# Altium PCB УШЯИ.467444.130.PcbDoc (part 4 of 4)
Units mm, origin at the board's own origin, x right, y up, seen from the top; angles counter-clockwise.
Board outline 280 x 190 mm, 6 copper layers (Top, GND, INT1, INT2, POWER, Bottom), stack 1.422 mm thick; 223 components, 176 nets, 1081 pads, 326 vias.
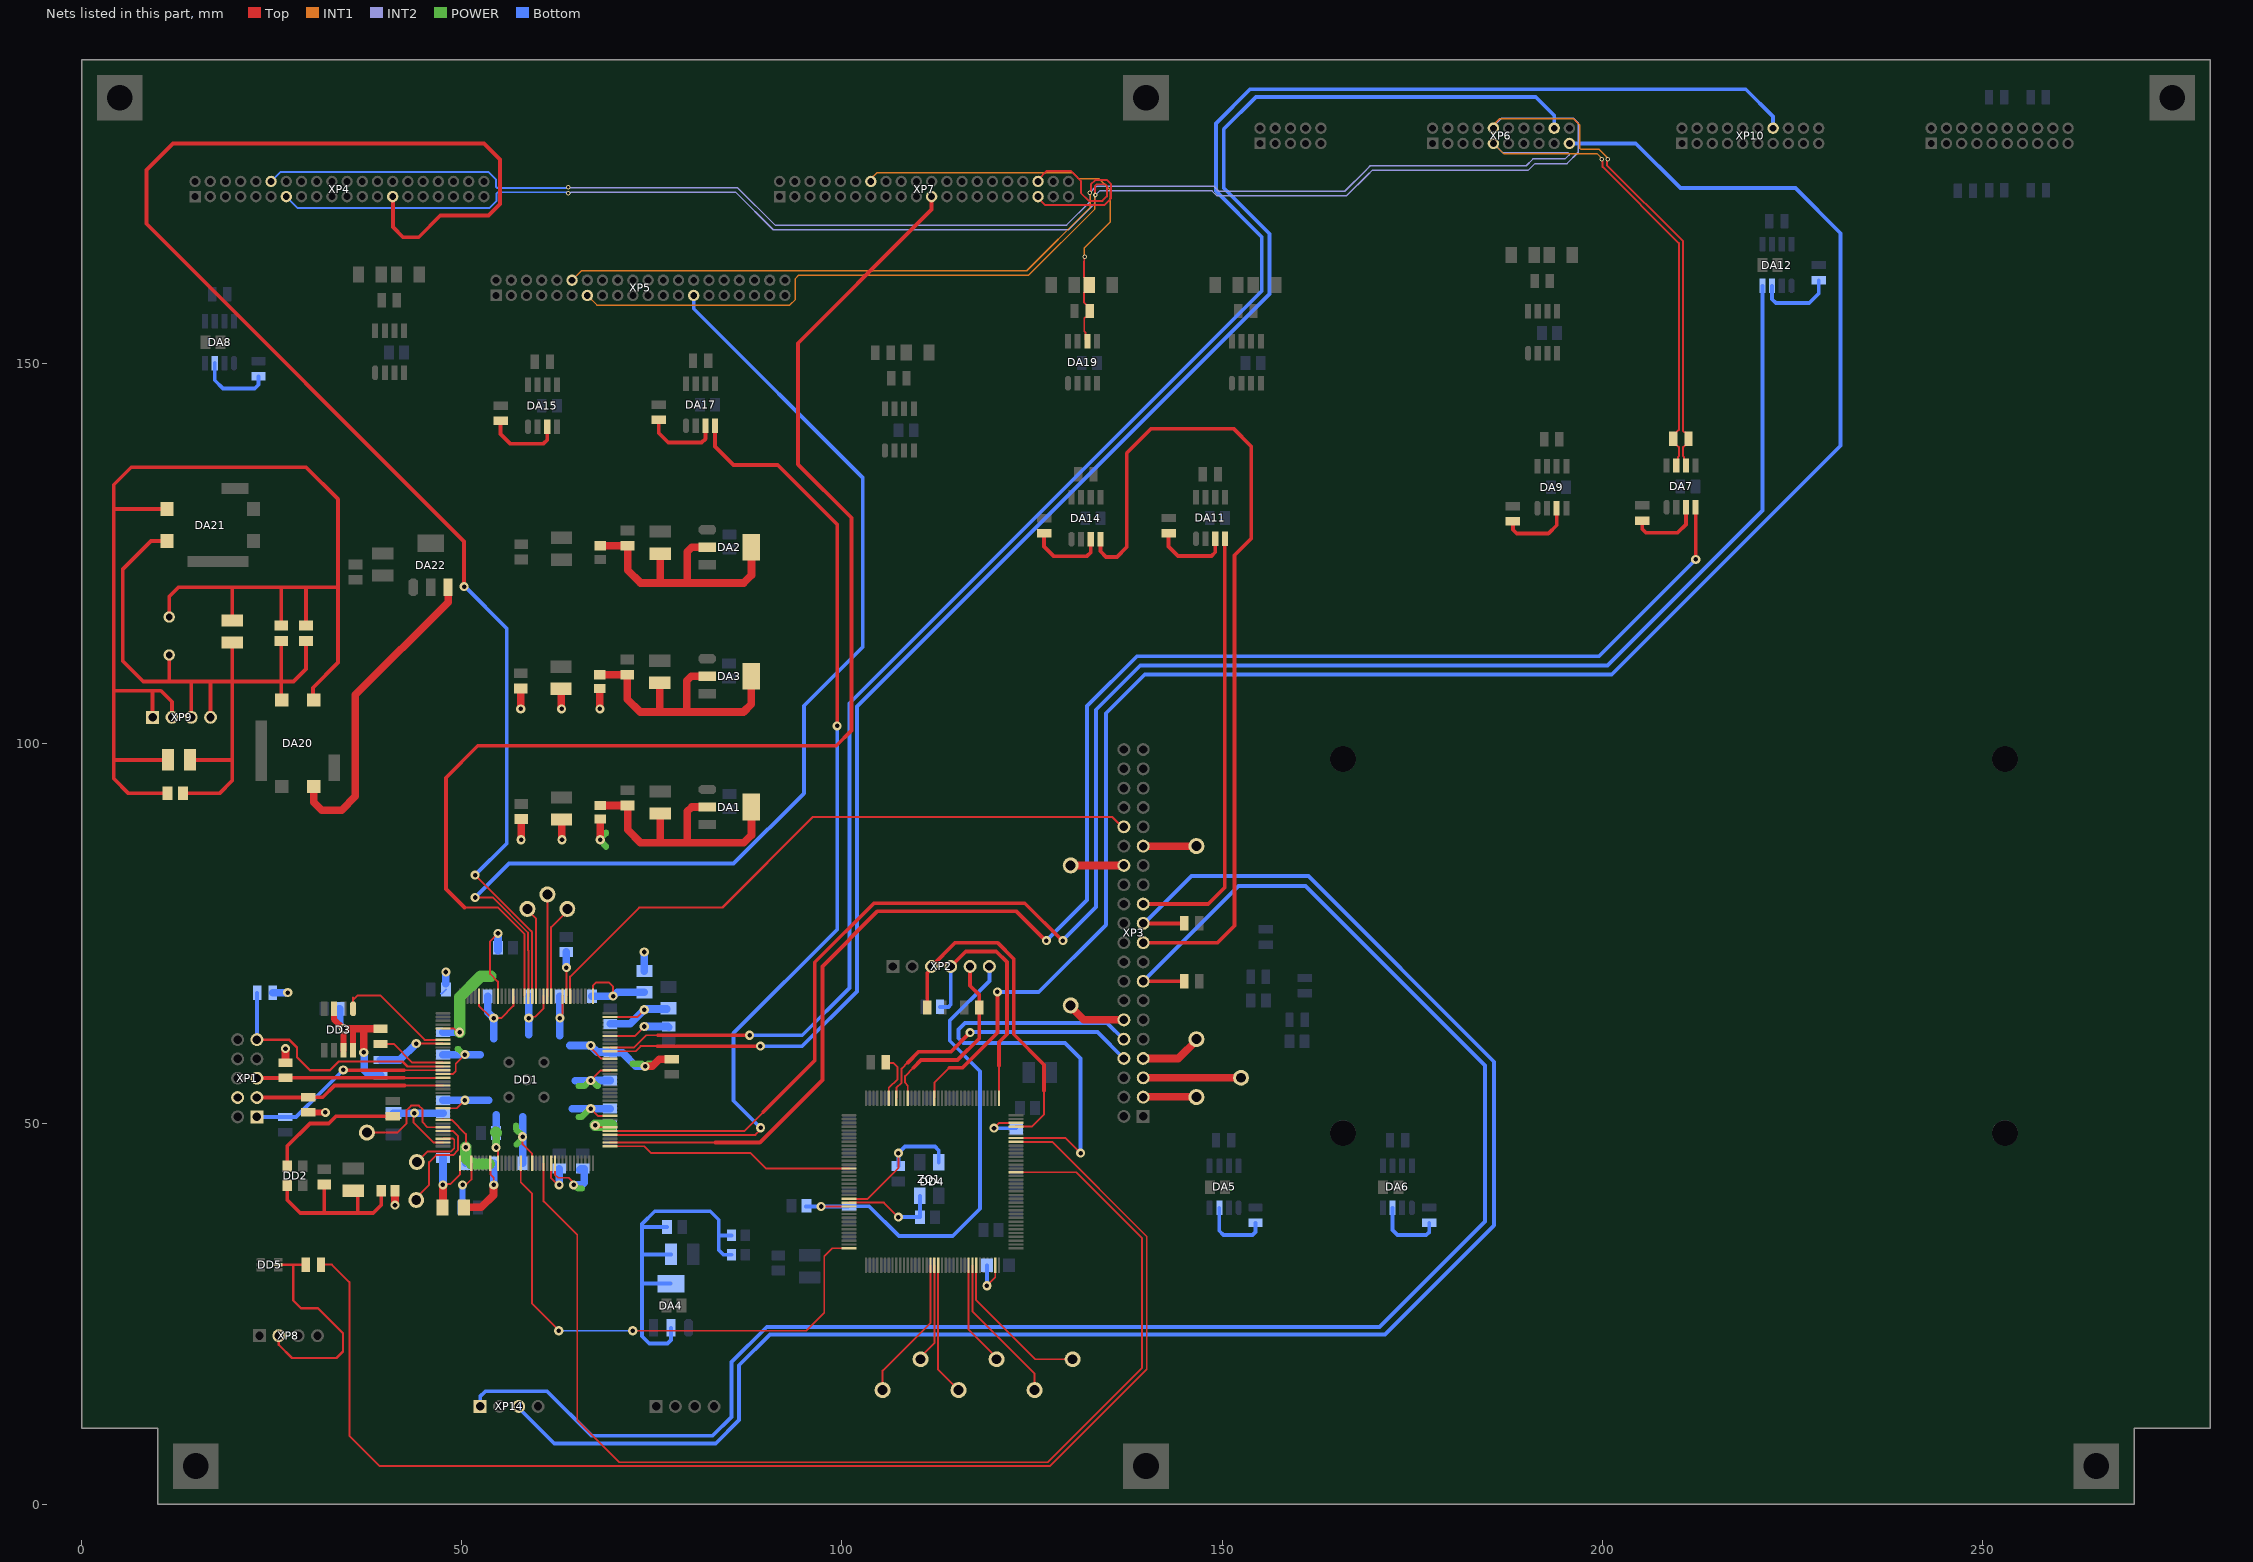
[diagram p8: the nets of this part, all layers, seen from the top]

## Via types
v1: diameter 1.2, hole 0.6, Top to Bottom, tented both sides, 284 vias
v2: diameter 0.6, hole 0.3, Top to Bottom, tented both sides, 42 vias

## Nets (pads, with @x,y where several pads share a name; then routed paths per layer and width w, separated by ;. In a path a pad name is that pad's centre, name@x,y a point inside that pad or via, vN(x,y) a via of type N, cw(c..) or ccw(c..) an arc to the next point about the centre after c; other vN are vias at no path point) (continued)
LINE_p: DA19.6 R47.2 R49.1 XP7.14 | length 56.1
  Top w0.25: v2(131.95,164.083) 131.883,164.016 131.883,163.508 131.825,163.45 131.825,162.215 131.825,161.375 132.55,160.65 R49.1@132.55,160.35 132.55,160.05 131.825,159.325 131.825,158.753 131.825,158.125 132.6,157.35 R47.2@132.6,156.95 132.6,156.55 132.175,156.125 132.021,156.125 131.875,155.979 131.875,154.538 131.875,154.275 132.052,154.098 132.052,153.183 DA19.6@132.285,152.95
  INT1 w0.2: XP7.14@103.8,174 103.8,174.35 104.6,175.15 130.4,175.15 131.026,174.524 131.026,174.458 131.144,174.341 133.833,174.341 135.275,172.899 135.275,168.642 131.85,165.217 131.85,164.4 131.873,164.377 131.873,164.16 v2(131.95,164.083)
N_CONF: DD1.14 R8.1 | length 9.2
  Top w0.25: R8.1@39.3,60.525 41.05,60.525 43.5,58.075 DD1.14@47.512,58.075
NCS: DD1.8 DD3.1 | length 15.9
  Top w0.25: DD3.1@35.705,65.175 35.705,66.654 ; 35.705,66.354 36.276,66.925 39.25,66.925 45.1,61.075 DD1.8@47.512,61.075
NetC1_2: C1.2 C2.+ DD2.4 L8.2 | length 23.9
  Top w0.5: DD2.4@27.025,41.925 27.025,40 28.75,38.275 31.899,38.275 ; C1.2@31.899,42.049 31.899,38.275 ; C2.+@36.199,41.099 36.297,41 36.297,38.275 ; L8.2@39.4,41.122 39.4,39.325 38.35,38.275 36.297,38.275 ; 31.899,38.275 36.297,38.275
NetC10_2: C10.2 C11.+ DA2.2 DA2.4 L6.1 | length 38.8
  Top w1: L6.1@68.2,126.075 C10.2@71.8,126.075 71.8,122.875 73.5,121.175 76.1,121.175 ; C11.+@76.1,125.025 76.1,121.175 ; DA2.2@82.3,125.875 80.236,125.875 79.65,125.289 79.65,121.175 ; DA2.4@88.1,125.875 88.1,122.175 87.1,121.175 79.65,121.175 ; 76.1,121.175 79.65,121.175
NetC25_2: C25.2 C26.+ DA1.2 DA1.4 L2.1 | length 38.8
  Top w1: L2.1@68.2,91.9 C25.2@71.8,91.9 71.8,88.7 73.5,87 76.1,87 ; C26.+@76.1,90.85 76.1,87 ; 79.65,87 79.65,91.114 80.236,91.7 DA1.2@82.3,91.7 ; DA1.4@88.1,91.7 88.1,88 87.1,87 76.1,87
NetC27_2: C27.2 C28.+ DA3.2 DA3.4 L7.1 | length 38.8
  Top w1: L7.1@68.15,109.1 C27.2@71.75,109.1 71.75,105.9 73.45,104.2 76.05,104.2 ; C28.+@76.05,108.05 76.05,104.2 ; 79.6,104.2 79.6,108.314 80.186,108.9 DA3.2@82.25,108.9 ; DA3.4@88.05,108.9 88.05,105.2 87.05,104.2 76.05,104.2
NetC59_+: C59.+ C94.2 DA4.2 DA4.4 L9.1 L10.1 | length 50.6
  Bottom w0.5: C94.2@77,36.45 73.725,36.45 73.7,36.475 ; DA4.4@77.481,29.025 73.7,29.025 ; DA4.2@77.506,23.2 77.506,21.581 77.05,21.125 74.65,21.125 73.7,22.075 73.7,29.025 ; C59.+@77.531,32.85 73.8,32.85 73.7,32.95 ; L9.1@85.475,32.8 85.468,32.807 84.418,32.807 83.8,33.425 83.8,35.41 ; L10.1@85.475,35.35 83.86,35.35 83.8,35.41 ; 73.7,29.025 73.7,32.95 ; 73.7,32.95 73.7,36.475 ; 73.7,36.475 73.7,36.85 75.375,38.525 82.67,38.525 83.8,37.395 83.8,35.41
NetC60_1: C60.1 DD4.24 ZQ1.1 | length 12.9
  Top w0.25: DD4.24@100.924,39.65 105.525,39.65 v1(107.425,37.75)
  Bottom w0.5: v1(107.425,37.75) C60.1@110.25,37.75 110.25,40.525 ZQ1.1@110.225,40.55
NetC61_1: C61.1 DD4.23 ZQ1.3 | length 19.3
  Top w0.25: DD4.23@100.924,40.15 103.375,40.15 107.425,44.2 v1(107.425,46.175)
  Bottom w0.5: C61.1@107.425,44.45 v1(107.425,46.175) 108.275,47.025 112.225,47.025 112.725,46.525 ZQ1.3@112.725,44.95
NetC66_+: C66.+ DD4.71 | length 5.8
  Top w0.25: v1(119.075,28.725) 120.162,29.812 DD4.71@120.162,31.412
  Bottom w0.5: v1(119.075,28.725) C66.+@119.075,31.425
NetC67_+: C67.+ DD4.106 | length 6.1
  Top w0.25: v1(120,49.45) 120.7,50.15 DD4.106@122.9,50.15
  Bottom w0.5: v1(120,49.45) C67.+@122.925,49.45
NetC82_1: C82.1 C84.1 C86.+ C87.2 C88.+ C89.+ DA20.1 DA21.1 XP9.1 XP9.2 | length 175
  Top w0.5: XP9.1@9.32,103.5 9.32,106.97 9.35,107 ; DA21.1@11.203,130.9 4.2,130.9 ; C89.+@11.321,97.9 4.4,97.9 4.2,98.1 ; C87.2@11.5,93.5 C87.2@11.3,93.5 6.15,93.5 4.2,95.45 4.2,98.1 ; C86.+@11.5,116.7 11.5,119.4 12.7,120.6 19.8,120.6 ; XP9.2@11.86,103.5 11.86,105.54 10.4,107 9.35,107 ; C88.+@19.8,116.25 19.8,120.6 ; C82.1@26.25,115.563 26.25,120.6 ; C84.1@29.5,115.563 29.5,120.6 ; DA20.1@30.4,105.4 30.4,107.4 33.7,110.7 33.7,120.6 ; 4.2,98.1 4.2,107 ; 4.2,107 4.2,130.9 ; 4.2,107 9.35,107 ; 4.2,130.9 4.2,134.103 6.497,136.4 29.5,136.4 33.7,132.2 33.7,120.6 ; 19.8,120.6 26.25,120.6 ; 26.25,120.6 29.5,120.6 ; 29.5,120.6 33.7,120.6
NetC82_2: C82.2 C84.2 C86.- C87.1 C88.- C89.- DA20.3 DA21.3 XP9.3 XP9.4 | length 100.9
  Top w0.5: DA21.3@11.203,126.7 9.087,126.7 5.4,123.013 5.4,110.878 8.079,108.199 11.597,108.199 ; C86.-@11.5,111.7 11.5,108.296 11.597,108.199 ; C87.1@13.9,93.5 18.1,93.5 19.8,95.2 19.8,97.9 ; C89.-@14.221,97.9 19.8,97.9 ; XP9.3@14.4,103.5 14.4,108.149 ; XP9.4@17.1,103.66 XP9.4@16.94,103.5 16.94,108.199 ; C88.-@19.8,113.35 19.8,108.199 ; DA20.3@26.25,105.225 26.25,108.4 C82.2@26.25,113.563 ; C84.2@29.5,113.563 29.5,109.856 27.843,108.199 19.8,108.199 ; 11.597,108.199 14.4,108.199 16.94,108.199 ; 16.94,108.199 19.6,108.199 ; 19.6,108.199 19.8,108.199 ; 19.6,108.199 19.8,107.999 19.8,97.9
NetDA5_3: DA5.3 R15.2 | length 9.4
  Bottom w0.5: DA5.3@149.645,38.992 149.645,35.955 150.2,35.4 154.005,35.4 154.405,35.8 R15.2@154.405,37.017
NetDA6_3: DA6.3 R17.2 | length 9.4
  Bottom w0.5: DA6.3@172.435,38.992 172.435,36.035 173.07,35.4 176.875,35.4 177.275,35.8 R17.2@177.275,37.017
NetDA7_3: DA7.3 R19.2 | length 9.8
  Top w0.5: R19.2@205.275,129.375 205.275,128.275 205.775,127.775 209.929,127.775 211.029,128.875 DA7.3@211.029,131.125
NetDA8_3: DA8.3 R20.2 | length 9.8
  Bottom w0.5: DA8.3@17.496,150.1 17.496,147.85 18.596,146.75 22.75,146.75 23.25,147.25 R20.2@23.25,148.35
NetDA9_3: DA9.3 R21.2 | length 9.8
  Top w0.5: R21.2@188.275,129.275 188.275,128.175 188.775,127.675 192.929,127.675 194.029,128.775 DA9.3@194.029,131.025
NetDA11_3: DA11.3 R28.2 | length 10.4
  Top w0.5: R28.2@142.975,127.725 142.975,125.975 144.225,124.725 148.61,124.725 149.11,125.225 DA11.3@149.11,126.975
NetDA12_3: DA12.3 R29.2 | length 10.4
  Bottom w0.5: DA12.3@222.365,160.25 222.365,158.5 222.865,158 227.25,158 228.5,159.25 R29.2@228.5,161
NetDA14_3: DA14.3 R35.2 | length 10.4
  Top w0.5: R35.2@126.6,127.7 126.6,125.95 127.85,124.7 132.235,124.7 132.735,125.2 DA14.3@132.735,126.95
NetDA15_3: DA15.3 R36.2 | length 10.4
  Top w0.5: R36.2@55.1,142.5 55.1,140.75 56.35,139.5 60.735,139.5 61.235,140 DA15.3@61.235,141.75
NetDA17_3: DA17.3 R42.2 | length 10.4
  Top w0.5: R42.2@75.9,142.634 75.9,140.884 77.15,139.634 81.535,139.634 82.035,140.134 DA17.3@82.035,141.884
NetDA20_2: DA20.2 DA22.3 | length 41.3
  Top w1: DA20.2@30.5,94.4 30.5,92.35 31.55,91.3 34.2,91.3 36,93.1 36,106.463 48.2,118.663 DA22.3@48.2,120.6
NetDD1_31: DD1.31 TP5.1 | length 14.7
  Top w0.25: TP5.1@37.505,48.875 41.5,48.875 42.725,50.1 42.725,51.825 43.325,52.425 44.35,52.425 44.825,51.95 44.825,50.225 45.475,49.575 DD1.31@47.512,49.575
NetDD1_32: DD1.32 TP4.1 | length 14.2
  Top w0.25: TP4.1@44,40 44,40.3 45.687,41.987 45.687,44.987 46.619,45.919 48.844,45.919 49.475,46.55 49.475,48.45 48.85,49.075 DD1.32@47.512,49.075
NetDD1_34: DD1.34 TP6.1 | length 8.3
  Top w0.25: TP6.1@44.075,45 45.444,46.369 48.544,46.369 49,46.825 49,47.92 48.854,48.066 47.521,48.066 DD1.34@47.512,48.075
NetDD1_120: DD1.120 TP1.1 | length 12.1
  Top w0.25: DD1.120@61.75,66.813 61.75,75.9 63.375,77.525 63.436,77.525 TP1.1@63.517,77.444 ; TP1.1@63.517,77.8 TP1.1@63.874,78.156
NetDD1_121: DD1.121 TP2.1 | length 13.1
  Top w0.25: TP2.1@61.162,79.888 61.25,79.8 DD1.121@61.25,66.813
NetDD1_124: DD1.124 TP3.1 | length 12
  Top w0.25: TP3.1@58.626,78.3 58.626,78.174 59.75,77.05 DD1.124@59.75,66.813
NetDD2_3: DD2.3 R2.1 | length 18.1
  Top w0.5: DD2.3@27.025,44.487 27.025,47.1 30,50.075 32.485,50.075 33.435,51.025 R2.1@40.9,51.025
NetDD4_54: DD4.54 TP12.1 | length 19
  Top w0.25: TP12.1@105.35,15 105.35,17.55 111.662,23.862 DD4.54@111.662,31.412
NetDD4_55: DD4.55 TP11.1 | length 13.1
  Top w0.25: TP11.1@110.35,19.05 110.35,19.35 112.162,21.162 DD4.55@112.162,31.412
NetDD4_56: DD4.56 TP10.1 | length 17.5
  Top w0.25: DD4.56@112.662,31.412 112.662,17.688 TP10.1@115.35,15
NetDD4_64: DD4.64 TP9.1 | length 13.7
  Top w0.25: DD4.64@116.662,30.742 116.662,22.938 TP9.1@120.796,18.804
NetDD4_65: DD4.65 TP8.1 | length 19.8
  Top w0.25: DD4.65@117.162,31.412 117.162,25.338 125.35,17.15 TP8.1@125.35,15
NetDD4_66: DD4.66 TP7.1 | length 20.5
  Top w0.25: DD4.66@117.662,31.412 117.662,26.838 125.45,19.05 TP7.1@130.35,19.05
NetDD4_138: DD4.138 R10.2 | length 6.4
  Top w0.25: R10.2@105.775,58.1 105.825,58.05 106.75,58.05 107.325,57.475 107.325,55.9 106.162,54.737 DD4.138@106.162,53.388
NetDD5_5: DD5.5 R50.2 XP8.2 | length 29.7
  Top w0.3: DD5.5@25.85,31.5 27.825,31.5 ; XP8.2@25.92,22.15 25.92,20.955 27.65,19.225 33.5,19.225 34.35,20.075 34.35,22.474 31.074,25.75 28.85,25.75 27.825,26.775 27.825,31.5 ; R50.2@29.475,31.5 27.825,31.5
NetTP13_1: TP13.1 XP3.3 | length 6.9
  Top w1: XP3.3@139.692,53.6 TP13.1@146.568,53.6
NetTP14_1: TP14.1 XP3.5 | length 12.9
  Top w1: XP3.5@139.78,56.1 TP14.1@152.65,56.1
NetTP15_1: TP15.1 XP3.7 | length 8.3
  Top w1: XP3.7@139.577,58.618 144.26,58.618 TP15.1@146.8,61.158
NetTP16_1: TP16.1 XP3.29 | length 7.2
  Top w1: XP3.29@139.655,86.556 TP16.1@146.825,86.556
NetTP17_1: TP17.1 XP3.12 | length 7.7
  Top w1: TP17.1@130.09,65.435 131.827,63.698 XP3.12@137.09,63.698
NetTP18_1: TP18.1 XP3.28 | length 7.1
  Top w1: TP18.1@130.025,83.953 130.072,84 XP3.28@137.09,84
NRST: C57.2 DD4.25 R14.2 XP2.6 | length 65.3
  Top w0.25: v1(97.25,39.15) DD4.25@100.924,39.15
  Bottom w0.5: C57.2@95.275,39.15 v1(97.25,39.15) 97.263,39.162 R14.2@100.813,39.162 ; R14.2@100.95,39.175 103.575,39.175 107.5,35.25 114.575,35.25 118.175,38.85 118.175,56.95 114.175,60.95 114.175,63.6 119.395,68.82 XP2.6@119.395,70.725
NSTAT: DD1.9 R6.1 | length 9.1
  Top w0.25: v1(44,60.575) DD1.9@47.512,60.575
  Bottom w1: R6.1@39.3,58.425 41.85,58.425 v1(44,60.575)
OVLB: DD1.125 XP4.27 | length 208.4
  Top w0.25: v1(51.75,82.75) 51.766,82.75 59.15,75.366 59.15,75.35 59.25,75.25 DD1.125@59.25,66.813
  Top w0.5: XP4.27@40.9,172 40.935,171.965 40.935,170.914 40.935,167.993 42.265,166.664 44.329,166.664 47.165,169.5 53.5,169.5 55.02,171.02 55.02,176.891 52.911,179 12,179 8.5,175.5 8.5,168.425 50.3,126.625 v1(50.3,120.7)
  Bottom w0.5: v1(50.3,120.7) 50.4,120.7 55.9,115.2 55.9,86.9 v1(51.75,82.75)
OVLI_1: DD1.98 XP6.18 | length 222.1
  Top w0.25: DD1.98@69.488,59.575 72.857,59.575 73.521,60.239 75.731,60.239
  Top w0.5: 75.731,60.239 v1(89.275,60.239)
  Bottom w0.5: v1(89.275,60.239) 94.789,60.239 102,67.45 102,104.925 156.25,159.175 156.25,167.125 150.225,173.15 150.225,180.875 154.45,185.1 191.275,185.1 193.7,182.675 XP6.18@193.7,181
OVLI_2: DD1.99 XP10.14 | length 251.6
  Top w0.25: DD1.99@69.488,60.075 72.65,60.075 74.25,61.675 75.771,61.675
  Top w0.5: 75.771,61.675 v1(87.85,61.675)
  Bottom w0.5: v1(87.85,61.675) 94.775,61.675 100.975,67.875 100.975,105.35 155.225,159.6 155.225,166.7 149.2,172.725 149.2,181.625 153.7,186.125 218.9,186.125 222.5,182.525 XP10.14@222.5,181
OVLP: DD1.126 XP5.27 | length 144.1
  Top w0.25: v1@51.737,79.813 54.067,79.813 58.7,75.179 58.7,72.85 58.75,72.8 DD1.126@58.75,66.813
  Bottom w0.5: v1(51.75,79.8) 56.2,84.25 85.75,84.25 95,93.5 95,105.025 102.75,112.775 102.75,135 80.5,157.25 XP5.27@80.5,159
OVLW: DD1.127 XP7.21 | length 172
  Top w0.25: 50.35,78.475 54.768,78.475 58.25,74.993 DD1.127@58.25,66.813
  Top w0.5: 50.35,78.475 47.9,80.925 47.9,95.553 52.098,99.75 99.25,99.75 101.25,101.75 101.25,129.75 94.221,136.779 94.221,152.721 109.825,168.325 111.8,170.3 XP7.21@111.8,172
PULSB: DA17.4 DD1.76 | length 129.9
  Top w0.25: DD1.76@69.488,48.575 88.619,48.575 89.3,49.256 v1(89.3,49.5)
  Top w0.5: DA17.4@83.305,141.884 83.305,139.12 85.721,136.704 91.546,136.704 99.375,128.875 v1(99.375,102.375)
  Bottom w0.5: v1(89.3,49.5) 85.75,53.05 85.75,61.95 99.375,75.575 v1(99.375,102.375)
PULSC: DA12.4 DD1.77 | length 241.9
  Top w0.25: DD1.77@69.488,49.075 87.15,49.075 89.65,51.575
  Top w0.5: 89.65,51.575 96.425,58.35 96.425,71.275 104.2,79.05 124.05,79.05 128.975,74.125 v1(129.075,74.125)
  Bottom w0.5: v1(129.075,74.125) 129.075,74.2 133.425,78.55 133.425,104.488 139.237,110.3 200.7,110.3 221.095,130.695 DA12.4@221.095,160.25
REQ_RD: DD1.115 XP3.32 | length 84.7
  Top w0.25: DD1.115@64.25,66.813 64.25,69.4 73.325,78.475
  Top w0.3: 73.325,78.475 84.275,78.475 96.175,90.375 135.55,90.375 136.9,89.025 XP3.32@137.125,89.025
RUN_ADC: DA7.4 DD1.74 | length 208.4
  Top w0.25: DD1.74@69.488,47.575 83.375,47.575
  Top w0.5: 83.375,47.575 89.2,47.575 97.425,55.8 97.425,70.725 104.7,78 122.9,78 126.775,74.125 v1(126.9,74.125) ; DA7.4@212.299,131.125 212.312,131.112 212.312,124.288 v1(212.325,124.275)
  Bottom w0.5: v1(126.9,74.125) 132.25,79.475 132.25,104.975 138.8,111.525 199.575,111.525 v1(212.325,124.275)
RUN_n: DA7.7 R24.1 XP4.12 XP5.12 XP6.9 XP7.35 | length 341.7
  Top w0.25: XP7.35@125.75,171.9 126.775,170.875 132.329,170.875 133.13,170.875 134.482,170.875 135.4,171.793 135.4,173.65 134.875,174.175 133.297,174.175 132.747,173.625 132.747,172.733 132.6,172.585 v2(132.6,172.491) ; v2(199.95,176.929) 200.017,176.862 200.017,176.666 200.075,176.608 200.075,175.922 210.1,165.897 210.1,141.3 209.375,140.575 R24.1@209.375,140.175 209.375,139.775 210.1,139.05 210.1,137.875 209.994,137.769 209.994,136.861 DA7.7@209.759,136.625
  INT1 w0.2: XP5.12@64.5,161 65.75,162.25 124.301,162.25 132.687,170.636 132.687,172.174 132.677,172.184 132.677,172.414 v2(132.6,172.491) ; XP6.9@185.7,179 187.043,177.657 199.318,177.657 199.774,177.201 199.95,177.025 v2(199.95,176.929)
  INT2 w0.2: v2(64,173.25) 64.077,173.173 64.294,173.173 64.317,173.15 86.304,173.15 91.204,168.25 129.547,168.25 132.687,171.39 132.687,171.895 132.677,171.906 132.677,172.414 v2(132.6,172.491) 133.459,173.35 148.932,173.35 149.582,172.7 166.146,172.7 168.926,175.48 169.144,175.699 169.496,176.05 190.009,176.05 190.909,176.95 195.135,176.95 195.652,177.467 195.652,177.633 195.535,177.75 186.95,177.75 XP6.9@185.7,179
  Bottom w0.25: XP4.12@24.9,174 26.15,175.25 53.5,175.25 54.5,174.25 54.5,173.271 54.646,173.125 56.489,173.125 63.679,173.125 63.737,173.183 63.933,173.183 v2(64,173.25)
RUN_p: DA7.6 R24.2 XP4.13 XP5.13 XP6.10 XP7.36 | length 353.7
  Top w0.25: XP7.36@125.8,174 125.8,174.25 126.925,175.375 130.125,175.375 131.425,174.075 131.425,172.475 132.475,171.425 133.358,171.425 134.254,171.425 134.85,172.021 134.85,173.422 134.647,173.625 133.525,173.625 133.297,173.397 133.297,172.26 v2(133.349,172.209) ; v2(200.75,176.929) 200.683,176.862 200.683,176.666 200.625,176.608 200.625,176.149 210.65,166.124 210.65,165.669 210.65,141.146 210.796,141 210.95,141 211.375,140.575 R24.2@211.375,140.175 211.375,139.775 210.65,139.05 210.65,137.85 210.762,137.738 210.762,136.892 DA7.6@211.029,136.625
  INT1 w0.2: XP5.13@66.5,159 67.775,157.725 93.125,157.725 93.875,158.475 93.875,161.225 94.3,161.65 124.55,161.65 133.287,170.387 133.287,172.147 v2(133.349,172.209) ; XP6.10@185.7,181 185.949,181.249 185.949,181.699 186.5,182.25 196.225,182.25 197.05,181.425 197.05,178.374 197.167,178.257 199.566,178.257 200.374,177.449 200.55,177.274 200.55,177.237 200.75,177.037 v2(200.75,176.929)
  INT2 w0.2: v2(64,172.45) 64.077,172.527 64.294,172.527 64.317,172.55 86.056,172.55 90.956,167.65 129.796,167.65 133.287,171.141 133.287,172.147 133.89,172.75 148.684,172.75 149.334,172.1 166.394,172.1 169.174,174.88 169.744,175.45 190.257,175.45 191.157,176.35 195.383,176.35 196.875,177.842 196.875,181.65 196.2,182.325 186.8,182.325 185.7,181.225 XP6.10@185.7,181
  Bottom w0.25: XP4.13@26.9,172 28.4,170.5 53.625,170.5 54.558,171.433 54.558,172.429 54.704,172.575 56.262,172.575 63.679,172.575 63.737,172.517 63.933,172.517 v2(64,172.45)
RX: DD4.102 XP3.10 | length 63.1
  Top w0.25: DD4.102@122.9,48.15 129.425,48.15 v1(131.4,46.175)
  Bottom w0.5: v1(131.4,46.175) 131.4,58.6 129.35,60.65 115.95,60.65 115.325,61.275 115.325,62.425 116.175,63.275 134.89,63.275 XP3.10@137.09,61.075
SMM32F4: DD1.73 DD4.15 | length 32.6
  Top w0.25: DD1.73@69.488,47.075 74.025,47.075 74.925,46.175 87.975,46.175 90,44.15 DD4.15@100.924,44.15
SPEED: DD4.126 XP6.19 | length 243.9
  Top w0.25: DD4.126@112.162,53.388 112.162,55.437 114.125,57.4
  Top w0.5: 114.125,57.4 115.85,57.4 120.45,62 v1(120.45,67.375)
  Bottom w0.5: v1(120.45,67.375) 125.9,67.375 134.725,76.2 134.725,104.025 139.825,109.125 201.275,109.125 231.375,139.225 231.375,167.175 225.425,173.125 210.3,173.125 204.425,179 XP6.19@195.7,179
SPI1_CLK: DA11.4 XP3.23 | length 57.4
  Top w0.5: XP3.23@139.655,78.936 148.186,78.936 150.35,81.1 DA11.4@150.35,126.945
SPI1_MOSI: DA14.4 XP3.19 | length 114.1
  Top w0.5: DA14.4@134,127.175 134,125.35 134.75,124.6 136.175,124.6 137.475,125.9 137.475,138.25 140.7,141.475 151.5,141.475 153.85,139.125 153.85,127.025 151.65,124.825 151.65,76.075 149.431,73.856 XP3.19@139.655,73.856
ST_TB: DD1.53 DD4.36 | length 71
  Top w0.25: DD1.53@57.75,44.837 57.75,42.35 59.25,40.85 59.25,26.35 62.75,22.85 v1(62.75,22.8) ; v1(72.475,22.8) 95.3,22.8 97.675,25.175 97.675,32.625 98.7,33.65 DD4.36@100.924,33.65
  Bottom w0.25: v1@62.85,22.8 v1(72.475,22.8)
START: R55.2 XP3.15 XP14.1 | length 238.1
  Top w0.5: XP3.15@139.655,68.776 R55.2@145.025,68.776
  Bottom w0.5: XP14.1@52.405,12.85 52.407,12.852 52.407,14.157 53.1,14.85 61.2,14.85 67.05,9 83.011,9 85.475,11.464 85.475,18.675 90.1,23.3 149.642,23.3 ; XP3.15@139.606,68.726 152.18,81.3 161,81.3 184.6,57.7 184.6,37.164 170.736,23.3 149.642,23.3 ; 149.513,23.3 149.642,23.3
STOP: R56.2 XP3.21 XP14.3 | length 233
  Top w0.5: XP3.21@139.655,76.396 R56.2@145.025,76.396
  Bottom w0.5: XP14.3@57.485,12.85 57.485,12.64 62.15,7.975 83.4,7.975 86.475,11.05 86.475,18.261 90.514,22.3 149.642,22.3 ; XP3.21@139.347,75.997 145.975,82.625 161.375,82.625 185.8,58.2 185.8,36.667 171.433,22.3 149.642,22.3 ; 149.446,22.3 149.642,22.3
SWCLK: DD4.109 R11.2 XP2.4 | length 33.7
  Top w0.25: DD4.109@120.662,53.388 120.662,57.662
  Top w0.5: XP2.4@114.315,70.725 116.29,72.7 120.3,72.7 121.7,71.3 121.7,61.8 120.662,60.762 120.662,57.662
  Bottom w0.5: R11.2@112.9,65.4 114,65.4 114.315,65.715 XP2.4@114.315,70.725
SWDIO: DD4.105 R13.2 XP2.3 | length 45.1
  Top w0.25: DD4.105@122.9,49.65 124.95,49.65 126.6,51.3 126.6,54.4
  Top w0.5: R13.2@111.225,65.325 111.225,69.85 111.775,70.4 XP2.3@111.775,70.725 114.906,73.856 120.444,73.856 122.6,71.7 122.6,61.8 126.6,57.8 126.6,54.4
TCK1: DD1.16 R7.1 XP1.1 | length 27
  Top w0.25: 42.4,57.075 DD1.16@47.512,57.075
  Top w0.5: v1(34.4,57.125) 34.45,57.075 42.4,57.075
  Bottom w0.5: XP1.1@23.056,50.925 28.2,50.925 31.633,54.358 v1(34.4,57.125)
TDI: DD1.15 R3.1 XP1.9 | length 33.8
  Top w0.25: 42.85,57.575 DD1.15@47.512,57.575
  Top w0.3: XP1.9@23.04,61.101 27.274,61.101 28.3,60.075 28.3,58.795 30.02,57.075 32.665,57.075 33.815,58.225 42.2,58.225 42.85,57.575
  Bottom w0.25: R3.1@23.04,67.215 R3.1@23.1,67.275
  Bottom w0.5: XP1.9@23.04,61.101 R3.1@23.04,67.215
TDO1: DD1.20 R4.1 XP1.3 | length 25.1
  Top w0.25: 42.45,55.075 DD1.20@47.512,55.075
  Top w0.5: XP1.3@23.04,53.481 23.062,53.503 29.778,53.503 R4.1@29.8,53.525 31.7,53.525 33.25,55.075 42.45,55.075
TMS1: DD1.18 R5.1 XP1.5 | length 24.5
  Top w0.25: 42.4,56.075 DD1.18@47.512,56.075
  Top w0.5: XP1.5@23.04,56.021 23.067,56.048 26.773,56.048 R5.1@26.8,56.075 42.4,56.075
TRACEWO: DD4.133 R12.2 XP2.5 | length 24.9
  Top w0.25: DD4.133@108.662,53.388 108.662,55.063 108.3,55.425 108.3,56.3 109.4,57.4
  Top w0.5: 109.4,57.4 110.4,58.4 115.2,58.4 118.075,61.275 R12.2@118.075,65.325 118.075,66.975 116.855,68.195 XP2.5@116.855,70.725
TX: DD4.136 XP3.8 | length 36.8
  Top w0.25: DD4.136@107.162,53.388 107.162,54.762 107.85,55.45 107.85,57.275 108.675,58.1
  Top w0.5: 108.675,58.1 110.075,59.5 114.339,59.5 v1(116.855,62.016)
  Bottom w0.5: v1(116.855,62.016) 116.939,62.1 133.6,62.1 XP3.8@137.05,58.65
VBUS: DD4.101 R50.1 | length 176.5
  Top w0.25: R50.1@31.475,31.5 32.9,31.5 35.2,29.2 35.2,9 39.2,5 127.35,5 140.1,17.75 140.1,35.2 127.65,47.65 DD4.101@122.9,47.65
VCC_PL1: C8.2 DD1.37 L4.2 | length 10.7
  Top w0.25: L4.2@47.462,39.025 L4.2@47.512,39.075 ; v1@47.512,41.549 v1@47.781,41.818 ; v1(47.512,42) 47.612,42.1 48.5,42.1 49.75,43.35 DD1.37@49.75,44.837
  Top w1: L4.2@47.512,39.075 v1@47.512,41.549
  Bottom w1: v1(47.512,42) C8.2@47.512,45.525
VCC_PL2: C9.2 DD1.109 L5.2 | length 12.7
  Top w0.25: DD1.109@67.25,66.813 67.25,68.175 67.7,68.625 69.342,68.625 69.9,68.067 v1(69.9,66.825)
  Bottom w1: C9.2@67.1,66.825 v1(69.9,66.825) ; v1@69.938,66.863 69.992,66.863 70.454,67.325 L5.2@74,67.325
VCCA1: C6.2 DD1.35 L1.2 | length 12.8
  Top w0.25: v1(43.75,51.425) 43.625,51.3 43.625,50.2 46.25,47.575 DD1.35@47.512,47.575
  Bottom w1: L1.2@41,51.425 v1(43.75,51.425) C6.2@47.512,51.425
VCCA2: C7.2 DD1.107 L3.2 | length 13.5
  Top w0.25: DD1.107@69.488,64.075 73.05,64.075 v1(74,65.025)
  Bottom w0.25: v1(74,65.025) v1@74.1,65.125 ; L3.2@76.937,65.125 L3.2@77.2,65.388
  Bottom w1: C7.2@69.5,63.175 72.15,63.175 v1(74,65.025) ; v1@74.1,65.125 L3.2@76.937,65.125
VCCIO: C4.2 C5.2 C17.2 C18.2 C19.2 C20.2 C21.2 C22.2 C23.2 C24.2 C39.2 C40.+ C41.2 C42.2 C43.2 C44.2 DD1.17 DD1.26 DD1.40 DD1.47 DD1.56 DD1.62 DD1.81 DD1.93 DD1.96 DD1.117 DD1.122 DD1.130 DD1.139 DD3.3 DD3.7 DD3.8 L2.2 L8.1 R3.2 R4.2 R5.2 R6.2 R8.2 R9.2 XP1.4 | length 177.6
  Top w0.25: DD1.26@47.512,52.075 49.35,52.075 v1(50.4,53.125) ; DD1.17@47.512,56.575 48.825,56.575 49.2,56.95 49.2,57.925 v1(50.4,59.125) ; v1@50.1,41.549 51.25,42.699 DD1.40@51.25,44.837 ; DD1.139@52.25,66.813 52.25,65.575 53.718,64.107 54.018,64.107 v1(54.2,63.925) 55.171,63.925 56.775,65.529 56.775,66.788 DD1.130@56.75,66.813 ; v1(54.5,46.913) 54.5,46.655 54.75,46.405 DD1.47@54.75,44.837 ; v1@58,48.525 v1(58,48.325) 58,47.325 59.25,46.075 DD1.56@59.25,44.837 ; v1@58.8,63.821 59.085,64.107 59.657,64.107 60.725,65.175 60.725,65.815 60.725,66.788 DD1.122@60.75,66.813 ; DD1.62@62.25,44.837 62.25,43.325 62.65,42.925 64.05,42.925 64.398,42.577 64.398,42.559 64.7,42.257 v1(64.7,42) ; v1@62.718,64.107 v1(62.9,63.925) 62.9,64.182 63.25,64.532 DD1.117@63.25,66.813 ; v1(66.95,52.025) 67.9,51.075 DD1.81@69.488,51.075 ; v1(66.95,55.725) 68.275,57.05 69.463,57.05 DD1.93@69.488,57.075 ; v1(66.95,60.325) 67.132,60.143 67.132,59.822 68.353,58.6 69.463,58.6 DD1.96@69.488,58.575
  Top w0.8: R4.2@29.8,51.525 v1(32.05,51.525) ; DD3.3@33.165,65.175 33.165,63.795 v1(34.435,62.525) DD3.7@34.435,59.675 ; DD3.8@35.705,59.675 35.705,62.525
  Top w1: R5.2@26.8,58.075 v1(26.8,59.925) ; v1(34.435,62.525) 35.705,62.525 37.1,62.525 ; v1(37.1,59.425) 37.1,62.525 ; R8.2@38.8,62.525 37.1,62.525 ; v1(41.2,39.325) L8.1@41.2,41.225 ; v1(57.8,87.4) C39.2@57.8,90.1 ; v1(63.174,87.4) 63.137,87.437 63.137,89.988 C40.+@63.174,90.025 ; v1(68.2,87.4) L2.2@68.2,90.1 ; v1(74.1,57.575) 74.135,57.61 75.035,57.61 75.964,58.539 77.586,58.539 R9.2@77.6,58.525
  POWER w0.8: 49.44,59.862 49.555,59.862 50.292,59.125 v1(50.4,59.125) ; 57.1,49.767 57.1,49.333 58,48.433 58,48.217 57.8,48.017 57.8,47.921 57.202,47.323 ; v1(64.7,42) 64.808,42 65.271,41.537 65.818,41.537 ; 65.342,54.986 66.103,54.986 66.842,55.725 v1(66.95,55.725) 67.058,55.725 67.795,54.988 67.91,54.988 ; 65.347,50.91 65.727,50.91 66.842,52.025 v1(66.95,52.025) ; 68.937,86.44 68.937,86.555 68.2,87.292 v1(68.2,87.4) 68.2,87.508 68.937,88.245 68.937,88.36 ; 72.421,57.925 73.642,57.925 73.992,57.575 v1(74.1,57.575) 74.208,57.575 74.558,57.925 75.181,57.925
  POWER w1: v1(54.5,46.913) 54.5,48.862
  POWER w1.5: 54.437,48.925 54.5,48.862
  Bottom w0.25: 47.249,67.162 47.375,67.162 47.9,67.687 C4.2@47.9,67.7 ; C4.2@47.9,68.475 47.924,68.451 C4.2@48,68.451 ; C24.2@69.454,59.471 C24.2@69.5,59.425
  Bottom w0.8: C19.2@50.1,39.025 v1@50.1,41.943
  Bottom w1: R3.2@25.1,67.275 v1(27.1,67.275) ; C44.2@33.9,65.175 33.9,63.114 34.435,62.579 v1(34.435,62.525) ; v1(37.1,59.425) v1@37.138,59.387 ; v1@37.138,59.087 37.138,57.056 37.724,56.47 39.255,56.47 R6.2@39.3,56.425 ; C17.2@47.512,53.125 v1(50.4,53.125) 53.554,53.125 ; C20.2@47.512,59.125 v1(50.4,59.125) 52.4,59.125 ; C4.2@47.9,68.475 v1(47.9,70) ; C21.2@53.4,66.825 53.4,64.725 v1(54.2,63.925) 54.2,61.195 ; v1(54.5,46.913) C18.2@54.5,48.825 54.5,51.225 ; C41.2@58,44.825 v1(58,48.325) 58,50.931 ; 58.8,61.755 v1(58.8,63.925) C22.2@58.8,66.825 ; 62.9,61.63 v1(62.9,63.925) C23.2@62.9,66.825 ; 64.222,60.325 v1(66.95,60.325) 67.804,59.471 C24.2@69.454,59.471 ; 64.55,52.025 v1(66.95,52.025) C43.2@69.488,52.025 ; v1(64.7,42) 65.85,42 66.1,42.25 C5.2@66.1,44.125 ; 64.9,55.687 66.912,55.687 v1(66.95,55.725) C42.2@69.5,55.725 ; C5.2@65.527,43.975 65.677,44.125 C5.2@65.9,44.125 ; C24.2@69.5,59.425 69.54,59.385 71.131,59.385 72.903,57.613 74.062,57.613 v1(74.1,57.575)
  other v1: 50.1,42
VCINT: C29.2 C30.+ C31.2 C32.2 C33.2 C34.2 C35.2 C36.2 C37.2 C38.2 DD1.5 DD1.29 DD1.45 DD1.61 DD1.78 DD1.102 DD1.116 DD1.134 L4.1 L5.1 L7.2 | length 86.9
  Top w0.25: DD1.29@47.512,50.575 47.537,50.55 48.647,50.55 50.525,48.672 v1(50.525,46.967) ; DD1.5@47.512,62.575 48.943,62.575 49.443,62.075 v1(49.7,62.075) ; DD1.45@53.75,44.837 53.75,43.375 54.2,42.925 v1(54.2,42) ; v1@54.099,42.326 54.099,41.65 v1@54.2,41.549 ; DD1.134@54.75,66.813 54.75,68.725 53.718,69.757 53.718,74.043 v1(54.75,75.075) ; DD1.61@61.75,44.837 61.75,42.875 62.625,42 v1(62.8,42) ; DD1.116@63.75,66.813 v1(63.75,70.575) ; v1(67.55,49.825) 67.807,49.825 68.057,49.575 DD1.78@69.488,49.575 ; DD1.102@69.488,61.575 72.75,61.575 v1(74,62.825)
  Top w1: L4.1@50.262,39.025 52.562,39.025 54.162,40.625 54.162,41.511 v1@54.2,41.549 ; v1(57.75,104.6) C29.2@57.75,107.3 ; v1(63.124,104.6) 63.087,104.637 63.087,107.188 C30.+@63.124,107.225 ; v1(68.15,104.6) L7.2@68.15,107.3
  POWER w1.5: v1(49.7,62.075) 49.7,66.65 52.489,69.439 53.796,69.439 53.82,69.463 ; v1(50.525,46.967) 50.525,45.536 51.324,44.738 53.634,44.738 ; v1(67.55,49.825) 69.692,49.825 69.75,49.767
  Bottom w1: C35.2@47.512,62.075 v1(49.7,62.075) ; C34.2@50.5,44.825 50.512,44.838 50.512,46.955 v1(50.525,46.967) ; v1(54.2,42) C31.2@54.2,44.825 ; C36.2@54.75,72.825 v1(54.75,75.075) ; v1(62.8,42) C33.2@62.8,44.125 ; v1(63.75,70.575) C37.2@63.75,72.625 ; v1(67.55,49.825) C32.2@69.5,49.825 ; v1(74,62.825) 77.1,62.825 C38.2@77.2,62.725 ; L5.1@74,70.125 v1(74,72.625)
WR_RG: DD1.59 DD4.93 | length 154.6
  Top w0.25: DD1.59@60.75,44.837 60.75,39.825 65.175,35.4 65.175,11.025 70.7,5.5 127.051,5.5 139.5,17.949 139.5,34.953 130.803,43.65 DD4.93@122.9,43.65
pads on no net: A1.0 DA5.1 DA5.2 DA6.1 DA6.2 DA7.1 DA7.2 DA8.1 DA8.2 DA9.1 DA9.2 DA10.3 DA10.4 DA11.1 DA11.2 DA12.1 DA12.2 DA13.3 DA13.4 DA14.1 DA14.2 DA15.1 DA15.2 DA16.3 DA16.4 DA17.1 DA17.2 DA18.3 DA18.4 DA19.3 DA19.4 DD1.1 DD1.2 DD1.3 DD1.4 DD1.7 DD1.10 DD1.11 DD1.22 DD1.23 DD1.28 DD1.30 DD1.33 DD1.38 DD1.39 DD1.42 DD1.43 DD1.44 DD1.46 DD1.50 DD1.51 DD1.52 DD1.54 DD1.55 DD1.64 DD1.65 DD1.66 DD1.67 DD1.68 DD1.79 DD1.86 DD1.87 DD1.88 DD1.89 DD1.90 DD1.91 DD1.100 DD1.101 DD1.103 DD1.105 DD1.106 DD1.113 DD1.114 DD1.128 DD1.129 DD1.135 DD1.141 DD1.142 DD1.143 DD1.144 DD2.1 DD4.1 DD4.2 DD4.3 DD4.4 DD4.5 DD4.7 DD4.8 DD4.12 DD4.13 DD4.14 DD4.18 DD4.32 DD4.34 DD4.35 DD4.37 DD4.40 DD4.41 DD4.42 DD4.43 DD4.53 DD4.59 DD4.60 DD4.63 DD4.67 DD4.68 DD4.69 DD4.70 DD4.73 DD4.74 DD4.75 DD4.79 DD4.85 DD4.86 DD4.87 DD4.88 DD4.96 DD4.97 DD4.98 DD4.99 DD4.100 DD4.110 DD4.111 DD4.112 DD4.113 DD4.114 DD4.115 DD4.116 DD4.117 DD4.118 DD4.119 DD4.122 DD4.123 DD4.124 DD4.125 DD4.127 DD4.128 DD4.129 DD4.132 DD4.134 DD4.135 DD4.137 DD4.139 DD4.140 DD4.141 DD4.142 XP1.6 XP1.7 XP1.8 XP3.1 XP3.2 XP3.4 XP3.9 XP3.17 XP3.33 XP3.37 XP3.38 XP3.40 XP4.30 XP4.31 XP4.32 XP4.33 XP4.34 XP4.35 XP4.36 XP4.37 XP4.38 XP4.39 XP4.40 XP5.22 XP5.24 XP5.25 XP5.29 XP5.30 XP5.31 XP5.32 XP5.33 XP5.34 XP5.35 XP5.36 XP5.37 XP5.38 XP5.39 XP5.40 XP7.22 XP7.23 XP7.24 XP7.25 XP7.37 XP7.38 XP7.39 XP7.40 XP10.18 XP12.16 XP12.17 XP12.18 XP12.19 XP12.20 ZQ1.2 ZQ1.4

## Polygon pours and split planes (outlines as drawn)
GND on Bottom "GND2" (hatched 45Degree grid 0.5 track 0.2, remove dead copper, pour order 30): -0.05,0 43.8,0 43.8,0.113 125.575,0.113 278.65,0.113 278.65,166.987 278.65,180.762 271.375,180.762 269.2,178.587 269.2,166.987 232.05,166.987 232.05,139.362 200.35,107.662 138.9,107.662 125.575,94.337 125.575,26.437 43.8,26.437 43.8,69.675 46.575,72.45 118.137,72.45 118.137,99.862 131.5,113.225 199.55,113.225 220.175,133.85 220.175,180.15 140.05,180.15 140.05,190 0.2,189.825 -0.05,189.575
VCCIO on Bottom "VCCIO" (solid, remove dead copper, pour order 0): 53.654,62.579 63.696,62.579 cw(c63.696,60.775) 65.5,60.775 65.5,52.425 cw(c63.4,52.425) 63.4,50.325 53.8,50.325 cw(c53.8,52.425) 51.7,52.425 51.7,60.625 cw(c53.654,60.625)
+2.5V on POWER "+2.5V" (solid, remove dead copper, pour order 26): 77.8,129.099 77.8,121.225 75.525,118.95 43.891,118.95 43.891,104.191 32.761,93.061 13.5,93.061 13.5,72.525 13.5,53.875 18.4,48.975 44.429,48.975 44.429,72.525 73.25,72.525 73.25,69.3 78.8,69.3 78.8,70.937 80.388,72.525 97.141,72.525 98.8,70.866 98.8,43.042 94.658,38.9 88.75,38.9 86.425,36.575 86.425,31.75 83.625,28.95 73.925,28.95 73.925,0 0,0 0,124 39.75,124 43.175,127.425 43.175,133.925 66.3,133.925 69.6,130.625 76.274,130.625
VCINT on POWER "VCINT" (solid, remove dead copper, pour order 11): 40.847,115.347 40.847,100.153 43.3,97.7 67.8,97.7 70.4,95.1 70.4,83.4 67.8,80.8 54,80.8 52.1,78.9 52.1,68.7 68.492,68.7 70.4,66.792 70.4,62.721 72.421,60.7 76.492,60.7 78.3,58.892 78.3,52.48 76.395,50.575 68.7,50.575 68.7,49.075 70.8,46.975 70.8,41.386 69.514,40.1 63.9,40.1 63.2,40.8 63.2,43.975 61.675,45.5 55.825,45.5 52.5,45.5 52.5,36.5 54.85,34.15 77.225,34.15 79.558,36.483 79.558,40.758 82.168,43.368 88.777,43.368 91.3,45.892 91.3,64.894 87.694,68.5 78.5,68.5 77.8,69.2 77.8,115.3 75.2,117.9 43.4,117.9
+5V on POWER "+5V" (solid, remove dead copper, pour order 9): 66.15,1.022 280,1.022 280,138.5 280,184 251.6,184 250.5,182.9 250.5,177.352 253.602,174.25 264.975,174.25 264.975,138.5 229.5,138.5 226,142 226,181.253 222.836,184.416 164.582,184.416 162.5,182.334 162.5,144.05 156.95,138.5 129,138.5 129,178.5 7,178.5 7,125.009 47.5,125.009 47.5,131.625 58.725,131.625 58.725,144.275 62.014,144.275 62.014,137.161 64.175,135 66.692,135 70.067,131.625 76.672,131.625 78.8,129.497 78.8,89.865 83.115,85.55 123.8,85.55 129,80.35 129,26.075 124.125,21.2 90.125,21.2 83.4,27.925 74.327,27.925 66.15,19.748
+3.3VB on POWER "+3.3VB" (solid, remove dead copper, pour order 2): 264.825,174.5 251.5,174.5 249.787,176.213 249.787,183.662 251.225,185.1 280,185.1 280,190 153.5,190 0.025,190 0.025,123.125 0.125,123.225 38.257,123.138 42.85,127.721 42.85,133.05 44.775,134.975 58.85,134.975 61,137.125 61,145.83 53.33,153.5 36.853,153.5 32.901,149.548 32.901,131.401 30.448,128.948 12.302,128.948 10,131.25 10,175.75 12.75,178.5 67,178.5 69,176.5 69,164.5 71,162.5 74.5,162.5 76.5,164.5 76.5,176.67 78.33,178.5 99.5,178.5 103,175 128,175 129,174 129,157.7 126.8,155.5 102,155.5 99.5,153 99.5,142.775 102.775,139.5 157.2,139.5 161.588,143.888 161.588,178.5 161.588,182.938 163.15,184.5 194.75,184.5 197.25,182 197.25,174.5 195.5,172.75 186.25,172.75 183.7,170.2 183.7,153.075 186.275,150.5 204,150.5 206.5,153 206.5,181.547 209.453,184.5 223.663,184.5 227,181.163 227,90.55 222.11,85.66 151.26,85.66 147.506,81.906 147.506,67.244 151.614,63.136 240.511,63.136 245.8,68.425 245.8,134.225 250.075,138.5 264.1,138.5 266.775,141.175 266.775,172.55
DVCST on POWER "DVCST" (solid, remove dead copper, pour order 10): 102.925,84.475 124.4,84.475 128.049,80.826 128.049,25.549 124.15,21.65 90.772,21.65 87,25.422 87,36.322 88.878,38.2 95.375,38.2 99.75,42.575 99.75,81.3
VCCIO on POWER "VCCIO" (solid, remove dead copper, pour order 18): 17.5,96.5 70.4,96.5 70.4,81.8 54.35,81.8 54.35,69.355 70.4,69.343 70.4,62.721 70.61,62.512 78.6,62.512 78.6,40.831 51.341,40.831 51.341,37.188 50.403,36.25 39.454,36.25 38.5,37.204 38.5,40.5 41.975,43.975 43,45 43,48.833 41.833,50 17.441,50 14.5,52.941 14.5,93.5
GND on Top "GND2" (hatched 45Degree grid 0.5 track 0.2, remove dead copper, pour order 31): 125.418,33.326 125.45,95.175 96.85,95.175 96.85,132.95 42.7,132.95 40.625,135.025 3.975,135.025 4.325,91.802 -0.125,91.802 0.002,135.025 -0.125,190.15 125.021,190.15 280.175,190.15 280.175,0.2 280.4,-0.025 125.472,-0.025 -0.025,-0.025 0.032,27.4 0.032,42.525 -0.025,91.475 34.35,91.475 34.35,53.65 24.072,53.65 24.072,42.525 98.047,42.525 98.047,33.228 103.875,27.4 119.507,27.4
GND on GND "GND" (solid, remove dead copper, pour order 1): 0,190 280,190 280,0 0,0

## Keep-outs
Keep-Out Layer:
  lines w0.25: 196.45,9.2 219.95,9.2 219.95,13.2 196.45,13.2 196.45,9.2 ; 246.75,9.2 255.85,9.2 255.85,13.2 246.75,13.2 246.75,9.2

## Other copper
Top:
  text "1" at 247.7,9.925 h4
  text "467444.130" at 197.45,9.9 h4
GND:
  text "2" at 249.404,9.925 h4
POWER:
  text "3" at 251.525,9.925 h4
Bottom:
  text "4" at 254.875,9.925 h4
  text "758726.458" at 219.45,9.9 h4

## Silkscreen, mask and mechanical layers (free items; w line width, h text height)
Top Overlay:
  text "467444.130" at 197.45,9.9 h4
Bottom Overlay:
  text "758726.458" at 219.45,9.9 h4
Board:
  the board outline again, w0.25
Plata:
  lines w0.25: 0,10 0,0 10,0 ; 0,185 10,185 ; 5,180 5,190 ; 10,5 20,5 ; 15,0 15,10 ; 135,5 145,5 ; 135,185 145,185 ; 140,0 140,10 ; 140,180 140,190 ; 260,5 270,5 ; 265,0 265,10 ; 270,185 280,185 ; 275,180 275,190 ; 10,0 10,10 20,10 20,0 10,0 ; 0,180 0,190 10,190 10,180 0,180 ; 135,0 135,10 145,10 145,0 135,0 ; 135,180 135,190 145,190 145,180 135,180 ; 260,0 260,10 270,10 270,0 260,0 ; 270,180 270,190 280,190 280,180 270,180
Drill Drawing:
  circle w0.25: c4.598,206.76 r1.714
  lines w0.25: -0.107,202.732 74.133,202.732 ; -0.107,256.723 74.133,256.723 ; 18.211,195.019 18.211,264.436 ; 38.501,195.019 38.501,264.436 ; 53.665,195.019 53.665,264.436 ; -0.107,195.019 74.133,195.019 74.133,264.436 -0.107,264.436 -0.107,195.019 ; 2.884,212.759 4.598,213.616 6.312,212.759 5.455,214.473 6.312,216.187 4.598,215.33 2.884,216.187 3.741,214.473 2.884,212.759 ; 2.884,221.329 3.741,221.329 3.741,220.472 5.455,220.472 5.455,221.329 6.312,221.329 6.312,223.043 5.455,223.043 5.455,223.9 3.741,223.9 3.741,223.043 2.884,223.043 2.884,221.329 ; 2.884,228.185 6.312,228.185 6.312,231.613 2.884,231.613 2.884,228.185 ; 2.884,239.326 6.312,239.326 4.598,235.898 2.884,239.326 ; 2.884,245.325 4.598,243.611 6.312,245.325 4.598,247.039 2.884,245.325 ; 2.884,251.324 2.884,252.181 3.741,253.038 2.884,253.895 2.884,254.752 3.741,254.752 4.598,253.895 5.455,254.752 6.312,254.752 6.312,253.895 5.455,253.038 6.312,252.181 6.312,251.324 5.455,251.324 4.598,252.181 3.741,251.324 2.884,251.324
  text "Symbol" at 4.52,259.037 h4.56
  text "Hole Size" at 20.525,259.037 h4.56
  text "Plated" at 40.815,259.037 h4.56
  text "Count" at 55.979,259.037 h4.56
  text "0.30mm" at 20.525,251.324 h3.8
  text "PTH" at 40.815,251.324 h3.8
  text "42" at 55.979,251.324 h3.8
  text "0.60mm" at 20.525,243.611 h3.8
  text "PTH" at 40.815,243.611 h3.8
  text "284" at 55.979,243.611 h3.8
  text "0.90mm" at 20.525,235.898 h3.8
  text "PTH" at 40.815,235.898 h3.8
  text "197" at 55.979,235.898 h3.8
  text "1.10mm" at 20.525,228.185 h3.8
  text "PTH" at 40.815,228.185 h3.8
  text "72" at 55.979,228.185 h3.8
  text "1.30mm" at 20.525,220.472 h3.8
  text "PTH" at 40.815,220.472 h3.8
  text "18" at 55.979,220.472 h3.8
  text "3.40mm" at 20.525,212.759 h3.8
  text "NPTH" at 40.815,212.759 h3.8
  text "4" at 55.979,212.759 h3.8
  text "3.40mm" at 20.525,205.046 h3.8
  text "PTH" at 40.815,205.046 h3.8
  text "6" at 55.979,205.046 h3.8
  text "623 Total" at 55.979,197.333 h3.8

## Text inside footprints (layer, text, board x,y; h text height)
C2: Top Overlay "+" at 39.505,38.075 h6 r90
C11: Top Overlay "+" at 77.8,120.775 h8 r90
C16: Top Overlay "+" at 67.5,120.875 h8 r90
C26: Top Overlay "+" at 77.9,86.6 h8 r90
C28: Top Overlay "+" at 77.75,103.8 h8 r90
C30: Top Overlay "+" at 67.35,103.925 h8 r90
C40: Top Overlay "+" at 67.4,86.6 h8 r90
C59: Bottom Overlay "+" at 74.175,34.725 h4 r180
C62: Bottom Overlay "+" at 121.075,61.075 h8 r180
C64: Bottom Overlay "+" at 98.125,35.775 h4 r90
C66: Bottom Overlay "+" at 117.1,29.775 h4 r180
C67: Bottom Overlay "+" at 126.35,50.725 h4 r90
C86: Top Overlay "+" at 9.7,122.2 h8 r270; Bottom Overlay "+" at 9.7,118.4 h8 r270
C88: Top Overlay "+" at 19.3,120.6 h8 r270
C89: Top Overlay "+" at 7.071,96 h8
C93: Top Overlay "+" at 40.6,128.4 h8 r270
DA1: Top Overlay "1" at 79.975,93.15 h4
DA2: Top Overlay "1" at 79.975,127.325 h4
DA3: Top Overlay "1" at 79.925,110.35 h4
DA4: Bottom Overlay "1" at 81.675,21.8 h4
DA5: Bottom Overlay "5" at 147.63,43.967 h2.5; Bottom Overlay "8" at 153.805,43.992 h2.5; Bottom Overlay "1" at 152.83,35.167 h4
DA6: Bottom Overlay "5" at 170.425,44.092 h2.5; Bottom Overlay "8" at 176.625,44.092 h2.5; Bottom Overlay "1" at 175.575,35.092 h4
DA7: Top Overlay "5" at 213.075,136.075 h2.5; Top Overlay "8" at 206.875,136.075 h2.5; Top Overlay "1" at 206.975,129.575 h4
DA8: Bottom Overlay "1" at 21.6,148.5 h4; Bottom Overlay "8" at 21.625,155.1 h2.5; Bottom Overlay "5" at 15.575,155.075 h2.5
DA9: Top Overlay "1" at 189.95,129.425 h4; Top Overlay "8" at 189.775,136 h2.5; Top Overlay "5" at 196.1,135.925 h2.5
DA10: Top Overlay "1" at 37,147.1 h4; Top Overlay "8" at 37,153.6 h2.5; Top Overlay "5" at 43.2,153.6 h2.5
DA11: Top Overlay "1" at 144.975,125.225 h4; Top Overlay "8" at 144.88,131.975 h2.5; Top Overlay "5" at 151.13,131.975 h2.5
DA12: Bottom Overlay "5" at 220.375,165.35 h2.5; Bottom Overlay "8" at 226.5,165.35 h2.5; Bottom Overlay "1" at 226.5,158.6 h4
DA13: Top Overlay "5" at 110.2,143.472 h2.5; Top Overlay "8" at 104.018,143.472 h2.5; Top Overlay "1" at 104.018,136.597 h4
DA14: Top Overlay "1" at 128.473,125.2 h4; Top Overlay "8" at 128.473,131.95 h2.5; Top Overlay "5" at 134.725,131.95 h2.5
DA15: Top Overlay "1" at 57.105,140.15 h4; Top Overlay "8" at 57.105,146.9 h2.5; Top Overlay "5" at 63.225,146.9 h2.5
DA16: Top Overlay "5" at 194.825,156.275 h2.5; Top Overlay "8" at 188.643,156.275 h2.5; Top Overlay "1" at 188.643,149.55 h4
DA17: Top Overlay "1" at 77.85,140.334 h4; Top Overlay "8" at 77.85,147.084 h2.5; Top Overlay "5" at 84.025,147.084 h2.5
DA18: Top Overlay "1" at 149.72,145.6 h4; Top Overlay "8" at 149.668,152.325 h2.5; Top Overlay "5" at 155.85,152.325 h2.5
DA19: Top Overlay "5" at 134.255,152.45 h2.5; Top Overlay "8" at 128.055,152.45 h2.5; Top Overlay "1" at 128.055,145.45 h4
DA20: Top Overlay "2" at 29.854,90.675 h4; Top Overlay "1" at 31.65,106.675 h4
DA21: Top Overlay "1" at 9.128,129.65 h4; Top Overlay "2" at 23.932,129.725 h4
DA22: Top Overlay "1" at 41.7,118.4 h4
DD1: Top Overlay "109" at 67.1,68.725 h2.5; Top Overlay "73" at 68.65,44.975 h2.5; Top Overlay "37" at 47.35,43.8 h2.5; Top Overlay "1" at 44.75,64.275 h4
DD2: Top Overlay "1" at 28.55,38.075 h4
DD3: Top Overlay "5" at 30.4,59.025 h2.5; Top Overlay "8" at 35.705,56.575 h2.5; Top Overlay "1" at 36.4,64.825 h4
DD4: Top Overlay "109" at 122.675,51.725 h2.5 r90; Top Overlay "73" at 122.062,31.55 h2.5; Top Overlay "37" at 100.762,30.375 h2.5; Top Overlay "1" at 98.162,50.85 h4
DD5: Top Overlay "1" at 21.301,31.901 h4
XP1: Top Overlay "1" at 24.94,49.661 h4; Top Overlay "2" at 17.44,49.561 h4; Bottom Overlay "2" at 19.14,50.16 h2.5; Bottom Overlay "1" at 24.81,50.154 h2.5; Bottom Overlay "9" at 25.12,60.32 h2.5; Bottom Overlay "10" at 19.142,60.314 h2.5
XP2: Top Overlay "1" at 102.545,69.525 h4; Bottom Overlay "6" at 121.545,69.925 h2.5; Bottom Overlay "1" at 105.295,69.925 h2.5
XP3: Top Overlay "2" at 131.7,49.748 h4; Top Overlay "1" at 143.5,49.739 h4; Bottom Overlay "13" at 140.406,100.748 h2.5; Bottom Overlay "14" at 137.948,100.83 h2.5; Bottom Overlay "2" at 137.37,47.966 h2.5; Bottom Overlay "1" at 139.858,47.955 h2.5
XP4: Top Overlay "1" at 8.648,169.825 h4; Top Overlay "2" at 8.145,172.925 h4; Bottom Overlay "1" at 13.49,171.22 h2.5; Bottom Overlay "2" at 13.54,173.33 h2.5; Bottom Overlay "40" at 56.312,173.33 h2.5; Bottom Overlay "39" at 56.159,171.22 h2.5
XP5: Top Overlay "1" at 48.248,156.825 h4; Top Overlay "2" at 47.745,159.925 h4; Bottom Overlay "1" at 53.09,158.22 h2.5; Bottom Overlay "2" at 53.14,160.33 h2.5; Bottom Overlay "40" at 95.912,160.33 h2.5; Bottom Overlay "39" at 95.759,158.22 h2.5
XP6: Top Overlay "2" at 174.945,179.725 h4; Top Overlay "1" at 175.448,176.8 h4; Bottom Overlay "19" at 198.54,178.22 h2.5; Bottom Overlay "20" at 198.859,180.33 h2.5; Bottom Overlay "2" at 176.34,180.33 h2.5; Bottom Overlay "1" at 176.29,178.22 h2.5
XP7: Top Overlay "1" at 85.548,169.825 h4; Top Overlay "2" at 85.045,172.925 h4; Bottom Overlay "1" at 90.39,171.22 h2.5; Bottom Overlay "2" at 90.44,173.33 h2.5; Bottom Overlay "40" at 133.212,173.33 h2.5; Bottom Overlay "39" at 133.059,171.22 h2.5
XP8: Top Overlay "1" at 19.23,20.95 h4; Bottom Overlay "1" at 21.98,21.35 h2.5; Bottom Overlay "4" at 33.44,21.35 h2.5
XP9: Top Overlay "1" at 5.17,102.3 h4; Bottom Overlay "1" at 7.92,102.7 h2.5; Bottom Overlay "4" at 19.38,102.7 h2.5
XP10: Top Overlay "2" at 207.745,179.725 h4; Top Overlay "1" at 208.248,176.8 h4; Bottom Overlay "19" at 231.34,178.22 h2.5; Bottom Overlay "20" at 231.659,180.33 h2.5; Bottom Overlay "2" at 209.14,180.33 h2.5; Bottom Overlay "1" at 209.09,178.22 h2.5
XP11: Top Overlay "1" at 71.4,11.65 h4; Bottom Overlay "1" at 74.15,12.05 h2.5; Bottom Overlay "4" at 85.61,12.05 h2.5
XP12: Top Overlay "2" at 240.545,179.725 h4; Top Overlay "1" at 241.048,176.8 h4; Bottom Overlay "19" at 264.14,178.22 h2.5; Bottom Overlay "20" at 264.459,180.33 h2.5; Bottom Overlay "2" at 241.94,180.33 h2.5; Bottom Overlay "1" at 241.89,178.22 h2.5
XP13: Top Overlay "2" at 152.245,179.725 h4; Top Overlay "1" at 152.748,176.8 h4; Bottom Overlay "9" at 165.06,178.22 h2.5; Bottom Overlay "10" at 165.84,180.33 h2.5; Bottom Overlay "2" at 153.64,180.33 h2.5; Bottom Overlay "1" at 153.59,178.22 h2.5
XP14: Top Overlay "1" at 48.255,11.65 h4; Bottom Overlay "4" at 62.465,12.05 h2.5; Bottom Overlay "1" at 51.005,12.05 h2.5
ZQ1: Bottom Overlay "1" at 109,38.65 h2.5